# EAGLE board pt2399_echo (EAGLE 7.1.0)
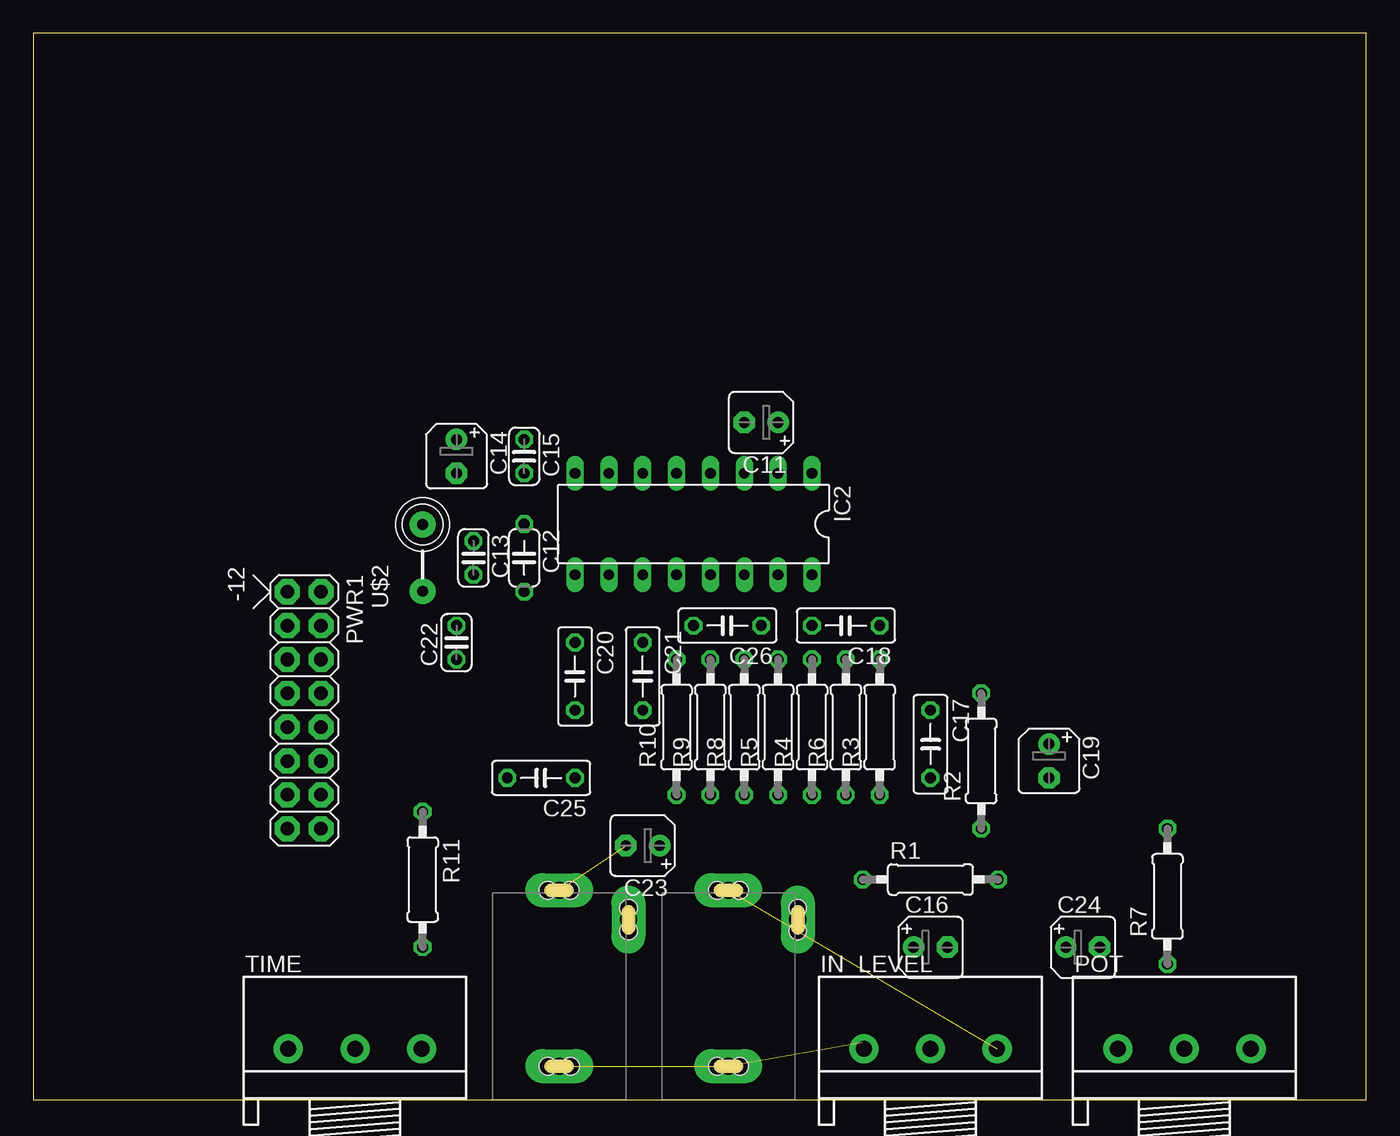
[diagram p0: board, top side]
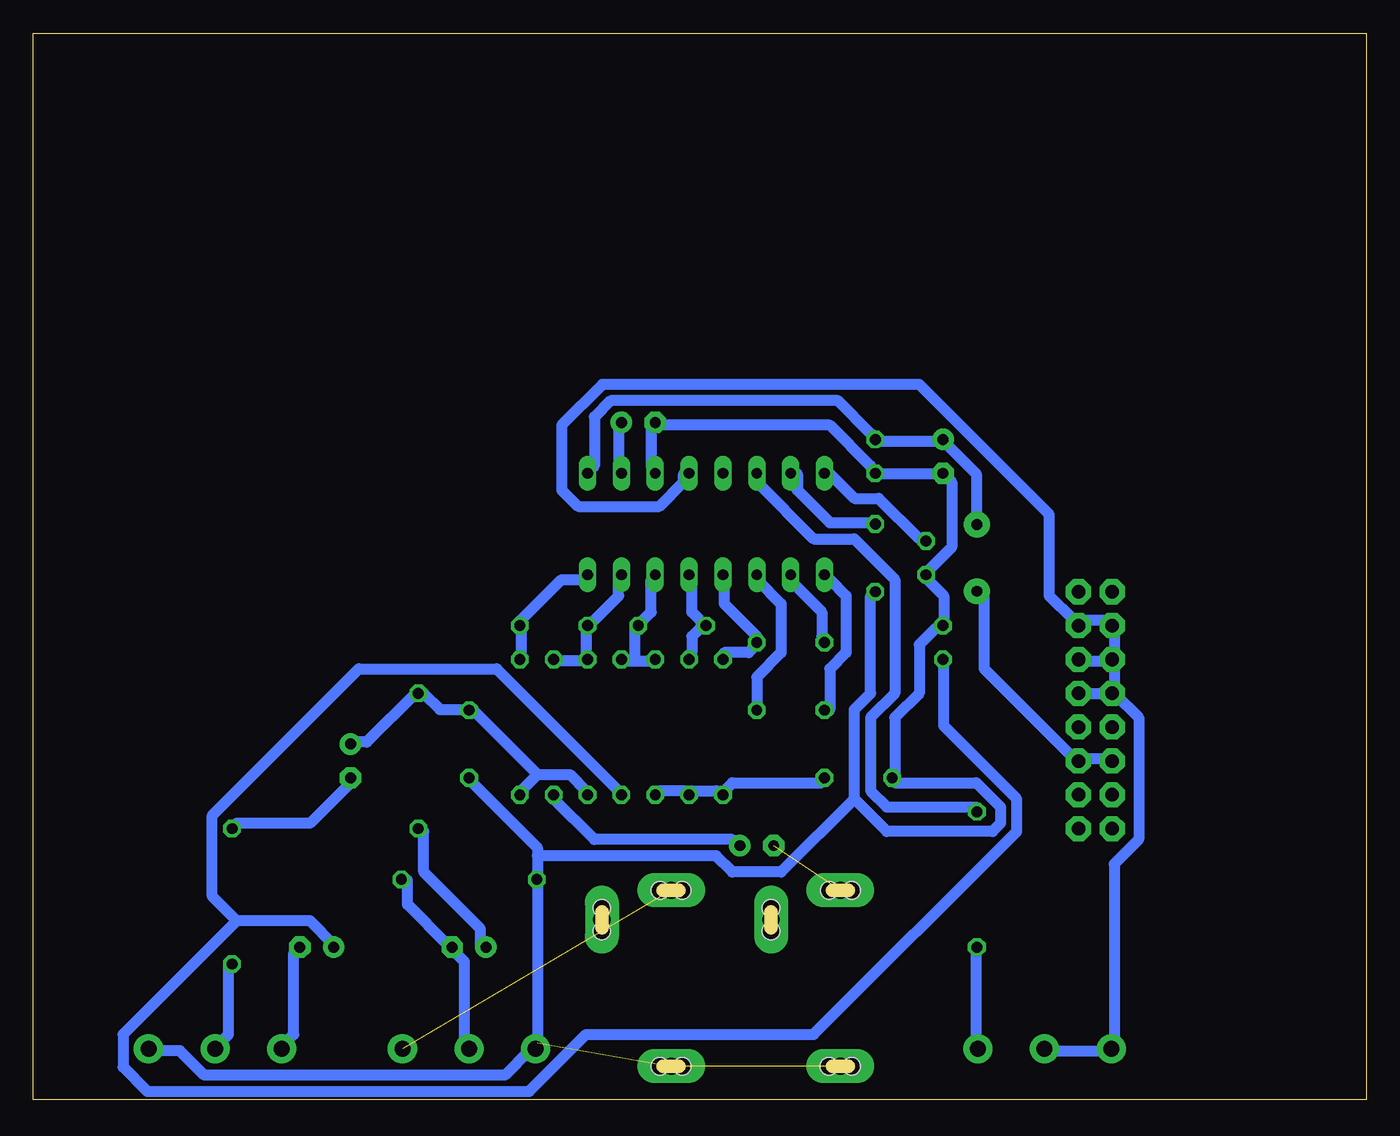
[diagram p1: board, bottom side, seen from below]

Size 100 x 80 mm. Coordinates in mm from the lower left corner, seen from the top.
Outline: 0,0 100,0 100,80 0,80 0,0
Copper layers (1*16): Top 0.035mm / dielectric 1.5mm / Bottom 0.035mm
Design rules "default *": minimum track width 32mil, minimum drill 31mil, track to track 16mil, track to pad 16mil, pad to pad 16mil, via to via 16mil, smd to smd 8mil, copper to edge 0mil, drill to drill 16mil, minimum pad ring 10mil, minimum via ring 8mil, stop-mask expansion 4mil, vias tented up to drill 0mil, thermal gap 10mil

## Footprints (pad centres in the part's own frame; a part is rotated, then mirrored left to right if it is on the bottom)
B45181A = drill 0.813 pad 1.6: + -1.27,0 | drill 0.813 pad 1.6 octagon: - 1.27,0
C050-024X044 = drill 0.813 octagon: 1 -2.54,0; 2 2.54,0
C025-024X044 = drill 0.813 octagon: 1 -1.27,0; 2 1.27,0
C050-025X075 = drill 0.813 octagon: 1 -2.54,0; 2 2.54,0
DIP16 = drill 0.813 long: 1 -7.62,-3.81; 2 -5.08,-3.81; 3 -2.54,-3.81; 4 0,-3.81; 5 2.54,-3.81; 6 5.08,-3.81; 7 7.62,-3.81; 8 10.16,-3.81; 9 10.16,3.81; 10 7.62,3.81; 11 5.08,3.81; 12 2.54,3.81; 13 0,3.81; 14 -2.54,3.81; 15 -5.08,3.81; 16 -7.62,3.81
3RP/1610N = drill 1.2 pad 2.184: 1 -5,0; 2 0,0; 3 5,0
ERTHENVAR-JACK-90DEG = drill 1.3 pad 2.54 long: P$1 5,-2.5; P$2 -0.2,-13.5; P$3 5,-15.7 | hole 1.3: 5.842,-2.489; 4.14,-2.489; -0.203,-12.649; -0.203,-14.351; 5.842,-15.697; 4.166,-15.697
POWER_16 = drill 1.016 pad 1.88 octagon: 1 -6.35,-1.27; 2 -6.35,1.27; 3 -3.81,-1.27; 4 -3.81,1.27; 5 -1.27,-1.27; 6 -1.27,1.27; 7 1.27,-1.27; 8 1.27,1.27; 9 3.81,-1.27; 10 3.81,1.27; 11 6.35,-1.27; 12 6.35,1.27; 13 8.89,-1.27; 14 8.89,1.27; 15 11.43,-1.27; 16 11.43,1.27
0207/10 = drill 0.813 octagon: 1 -5.08,0; 2 5.08,0
FB = drill 0.8 pad 1.93: P$1 -2.5,0; P$2 2.5,0

## Placement (x,y rotation side)
C11  47u  [B45181A]  54.61,50.8 180 top
C12  100n  [C050-024X044]  36.83,40.64 270 top
C13  100n  [C025-024X044]  33.02,40.64 270 top
C14  100u  [B45181A]  31.75,48.26 270 top
C15  100n  [C025-024X044]  36.83,48.26 270 top
C16  4u7  [B45181A]  67.31,11.43 0 top
C17  3n9  [C050-025X075]  67.31,26.67 270 top
C18  560p  [C050-025X075]  60.96,35.56 180 top
C19  4u7  [B45181A]  76.2,25.4 270 top
C20  82n  [C050-025X075]  40.64,31.75 270 top
C21  82n  [C050-025X075]  45.72,31.75 270 top
C22  10n  [C025-024X044]  31.75,34.29 90 top
C23  10u  [B45181A]  45.72,19.05 180 top
C24  10u  [B45181A]  78.74,11.43 0 top
C25  3n3  [C050-025X075]  38.1,24.13 180 top
C26  560p  [C050-025X075]  52.07,35.56 180 top
IC2  [DIP16]  50.8,43.18 180 top
IN_LEVEL  100k  [3RP/1610N]  67.31,3.81 0 top
INPUT  AUDIO-JACK  [ERTHENVAR-JACK-90DEG]  57.15,0 180 top
OUT  AUDIO-JACK  [ERTHENVAR-JACK-90DEG]  44.45,0 180 top
POT  50k  [3RP/1610N]  86.36,3.81 0 top
PWR1  POWER  [POWER_16]  20.32,31.75 270 top
R1  100k  [0207/10]  67.31,16.51 0 top
R2  15k  [0207/10]  71.12,25.4 90 top
R3  10k  [0207/10]  63.5,27.94 90 top
R4  10k  [0207/10]  58.42,27.94 90 top
R5  5k6  [0207/10]  55.88,27.94 90 top
R6  4k7  [0207/10]  60.96,27.94 90 top
R7  18k  [0207/10]  85.09,15.24 90 top
R8  15k  [0207/10]  53.34,27.94 90 top
R9  10k  [0207/10]  50.8,27.94 90 top
R10  10k  [0207/10]  48.26,27.94 90 top
R11  10k  [0207/10]  29.21,16.51 270 top
TIME  20k  [3RP/1610N]  24.13,3.81 0 top
U$2  FB  [FB]  29.21,40.64 90 top

## Library data of the parts
C11-C26 R1-R11 = rcl
IC2 = echounit
IN_LEVEL POT TIME = pot
INPUT OUT = erthenvar
PWR1 = eurorack
U$2 = adafruit

## Nets
+5V: C14.+ C15.1 IC2.1 U$2.P$2
AGND: C11.- C12.2 C13.2 C14.- C15.2 C17.2 C22.2 C25.2 IC2.3 IN_LEVEL.1 INPUT.P$1 OUT.P$1 POT.3 R1.1
GND: IC2.4 PWR1.3 PWR1.4 PWR1.5 PWR1.6 PWR1.7 PWR1.8 TIME.1 TIME.2
N$1: PWR1.11 PWR1.12 U$2.P$1
N$3: C23.+ R6.1
N$4: C12.1 IC2.7
N$5: C13.1 IC2.8
N$7: IN_LEVEL.3 INPUT.P$3
N$8: C11.+ IC2.2
N$9: C16.+ R2.1
N$10: C16.- IN_LEVEL.2 R1.2
N$11: C18.2 IC2.15 R4.2 R6.2
N$12: C18.1 IC2.16 R3.2
N$13: C17.1 C19.+ R2.2 R3.1 R4.1
N$14: C20.2 IC2.9
N$15: C20.1 IC2.10
N$16: C21.2 IC2.11
N$17: C23.- OUT.P$3
N$18: C26.1 IC2.14 R5.2 R8.2
N$19: C19.- R7.2
N$20: POT.2 R7.1
N$21: C22.1 C24.+ R5.1
N$22: C24.- POT.1
N$23: C21.1 IC2.12 R10.2
N$24: C26.2 IC2.13 R9.2
N$25: C25.1 R8.1 R9.1 R10.1
N$28: R11.2 TIME.3
N$29: IC2.6 R11.1

## Tracks (layer width: path | path; a pad name or v marks a point on that pad's centre or on a via)
+5V
  Bottom 0.813: IC2.1 57.91,47.55 57.91,51.21 56.69,52.43 39.62,52.43 37.19,49.99 C15.1 36.58,49.38 32.31,49.38 C14.+ 31.7,49.38 29.26,46.94 29.26,43.28 U$2.P$2
AGND  (2 unrouted)
  Bottom 0.813: 62.18,18.29 62.18,18.9 67.06,23.77 C17.2 | 62.18,18.29 62.18,17.07 R1.1 62.18,16.46 62.18,4.27 IN_LEVEL.1 62.79,3.66 64.62,1.83 87.17,1.83 89,3.66 90.83,3.66 POT.3 | 38.41,22.55 38.41,29.26 37.19,30.48 37.19,37.8 C12.2 | 38.41,22.55 35.97,20.12 28.04,20.12 27.43,20.73 27.43,21.95 29.26,23.77 35.36,23.77 C25.2 35.36,24.38 35.36,28.65 33.53,30.48 33.53,34.14 32.31,35.36 C22.2 31.7,35.97 31.7,37.8 32.92,39.01 C13.2 32.92,39.62 31.09,41.45 31.09,46.33 C14.- 32.31,46.94 36.58,46.94 C15.2 37.19,47.55 40.23,50.6 53.03,50.6 C11.- 53.65,50.6 53.65,47.55 IC2.3 | 62.18,18.29 48.77,18.29 47.55,17.07 43.89,17.07 38.41,22.55
GND
  Bottom 0.813: TIME.2 23.77,3.66 19.51,3.66 TIME.1 18.9,4.27 18.9,17.68 17.07,19.51 17.07,28.65 18.9,30.48 | PWR1.8 PWR1.7 18.9,30.48 | PWR1.5 19.51,32.92 21.34,32.92 PWR1.6 | 18.9,30.48 18.9,32.92 PWR1.5 | IC2.4 51.21,46.94 51.21,46.33 53.03,44.5 59.13,44.5 60.35,45.72 60.35,50.6 57.3,53.65 33.53,53.65 23.77,43.89 23.77,37.8 21.95,35.97 PWR1.4 21.34,35.97 19.51,35.97 PWR1.3 18.9,35.36 18.9,33.53 PWR1.5
N$1
  Bottom 0.813: PWR1.11 19.51,25.6 21.34,25.6 PWR1.12 21.95,25.6 28.65,32.31 28.65,37.8 U$2.P$1
N$3
  Bottom 0.813: R6.1 60.96,22.55 57.91,19.51 47.55,19.51 C23.+
N$4
  Bottom 0.813: C12.1 37.19,43.28 40.23,43.28 42.67,45.72 42.67,46.94 IC2.7
N$5
  Bottom 0.813: C13.1 33.53,42.06 36.58,45.11 38.41,45.11 40.23,46.94 IC2.8
N$7  (1 unrouted)
N$8
  Bottom 0.813: IC2.2 56.08,47.55 56.08,50.6 C11.+
N$9
  Bottom 0.813: R2.1 70.71,20.12 70.71,17.07 66.45,12.8 66.45,11.58 C16.+
N$10
  Bottom 0.813: R1.2 71.93,16.46 71.93,14.63 68.89,11.58 C16.- 68.28,10.97 67.67,10.36 67.67,4.27 IN_LEVEL.2
N$11
  Bottom 0.813: IC2.15 56.08,39.01 56.08,37.8 57.91,35.97 C18.2 58.52,35.36 58.52,33.53 R4.2 58.52,32.92 60.96,32.92 R6.2
N$12
  Bottom 0.813: IC2.16 58.52,39.01 60.35,39.01 63.4,35.97 C18.1 63.4,35.36 63.4,33.53 R3.2
N$13
  Bottom 0.813: 62.18,24.38 59.74,24.38 58.52,23.16 R4.1 | 62.18,24.38 63.4,23.16 R3.1 | C19.+ 76.2,26.82 74.98,26.82 71.32,30.48 R2.2 70.71,30.48 69.49,29.26 67.67,29.26 C17.1 67.06,29.26 62.18,24.38
N$14
  Bottom 0.813: C20.2 40.23,29.26 40.23,32.31 39.01,33.53 39.01,37.8 40.23,39.01 IC2.9
N$15
  Bottom 0.813: C20.1 40.84,34.75 40.84,36.58 43.28,39.01 IC2.10
N$16
  Bottom 0.813: C21.2 45.72,31.7 43.89,33.53 43.89,37.19 45.72,39.01 IC2.11
N$17  (1 unrouted)
N$18
  Bottom 0.813: 54.86,32.92 55.47,32.92 R5.2 | 54.86,32.92 53.65,32.92 R8.2 | 54.86,32.92 54.86,35.36 C26.1 54.25,35.97 53.65,36.58 53.65,39.01 IC2.14
N$19
  Bottom 0.813: R7.2 84.73,20.73 79.25,20.73 76.2,23.77 C19.-
N$20
  Bottom 0.813: R7.1 85.34,9.75 85.34,4.88 85.95,4.27 POT.2
N$21
  Bottom 0.813: 84.73,13.41 93.27,4.88 93.27,2.44 91.44,0.61 62.79,0.61 58.52,4.88 41.45,4.88 26.21,20.12 26.21,22.55 31.7,28.04 31.7,32.92 C22.1 | 84.73,13.41 79.25,13.41 77.42,11.58 C24.+ | 84.73,13.41 86.56,15.24 86.56,21.34 75.59,32.31 65.23,32.31 56.08,23.16 R5.1
N$22
  Bottom 0.813: C24.- 80.47,10.97 80.47,4.88 81.08,4.27 POT.1
N$23
  Bottom 0.813: R10.2 48.16,33.53 46.33,33.53 45.72,34.14 C21.1 45.72,34.75 48.16,37.19 48.16,39.01 IC2.12
N$24
  Bottom 0.813: R9.2 50.6,33.53 50.6,34.75 49.99,35.36 C26.2 49.99,35.97 50.6,36.58 50.6,39.01 IC2.13
N$25
  Bottom 0.813: R8.1 53.03,23.16 51.21,23.16 R9.1 50.6,23.16 48.77,23.16 R10.1 48.16,23.16 47.55,23.77 40.84,23.77 C25.1
N$28
  Bottom 0.813: R11.2 29.26,10.97 29.26,4.27 TIME.3
N$29
  Bottom 0.813: IC2.6 45.72,46.33 41.45,42.06 38.41,42.06 35.36,39.01 35.36,30.48 37.19,28.65 37.19,23.16 35.97,21.95 29.26,21.95 R11.1